# EAGLE board pic_z-machine_emulator (EAGLE 5.07)
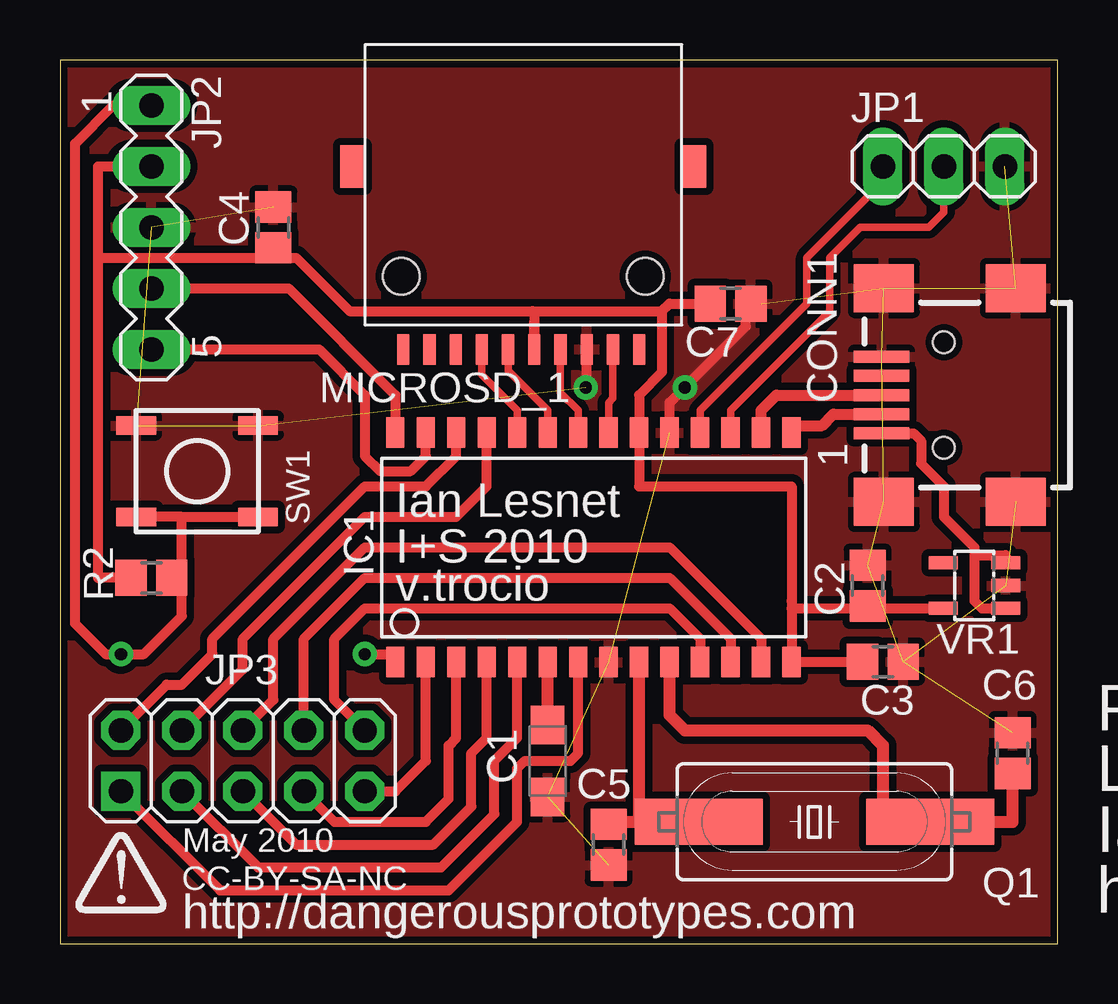
[diagram p0: board, top side]
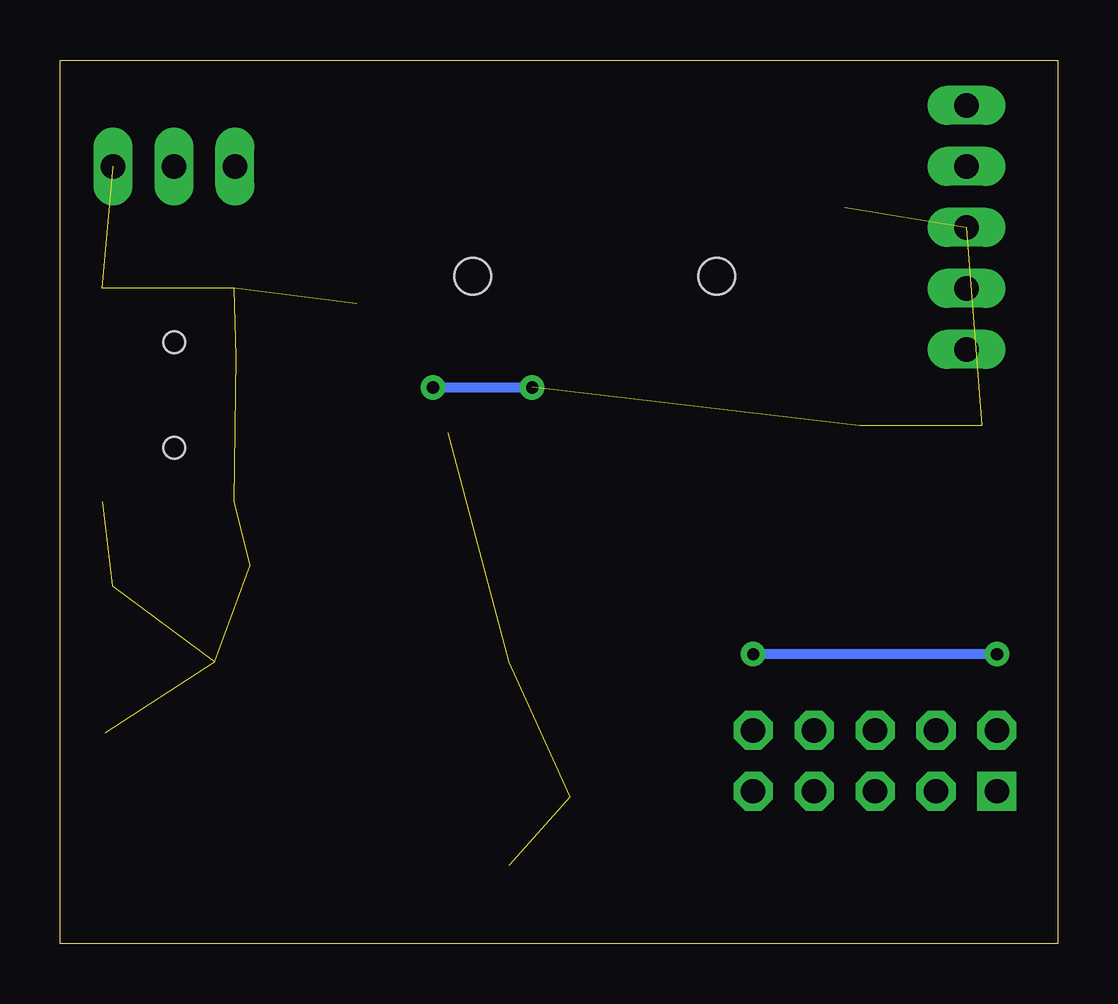
[diagram p1: board, bottom side, seen from below]

Size 41.58 x 36.82 mm. Coordinates in mm from the lower left corner, seen from the top.
Outline: 0,0 41.58,0 41.58,36.82 0,36.82 0,0
Copper layers (1*16): Top 0.035mm / dielectric 1.5mm / Bottom 0.035mm
Design rules "SparkFun": minimum track width 8mil, minimum drill 20mil, track to track 8mil, track to pad 8mil, pad to pad 8mil, via to via 8mil, smd to smd 8mil, copper to edge 10mil, drill to drill 8mil, minimum pad ring 12mil, minimum via ring 10mil, stop-mask expansion 4mil, vias tented up to drill 25mil, thermal gap 10mil

## Footprints (pad centres in the part's own frame; a part is rotated, then mirrored left to right if it is on the bottom)
SMC_A = smd 1.6 x 1.4: + -1.5,0; - 1.5,0
C805 = smd 1.3 x 1.5: 1 -0.85,0; 2 0.85,0
CONN_USB_MINI-B = smd 2 x 2.5: BODY@1 -4.45,2.5; BODY@2 4.45,2.5; BODY@3 4.45,-3; BODY@4 -4.45,-3 | smd 0.5 x 2.3: D+ 0,2.6; D- -0.8,2.6; GND 1.6,2.6; P4 0.8,2.6; VUSB -1.6,2.6 | hole 0.9: -2.2,0; 2.2,0
SOIC28W = smd 0.762 x 1.27: 1 -8.89,-4.78; 2 -7.62,-4.78; 3 -6.35,-4.78; 4 -5.08,-4.78; 5 -3.81,-4.78; 6 -2.54,-4.78; 7 -1.27,-4.78; 8 0,-4.78; 9 1.27,-4.78; 10 2.54,-4.78; 11 3.81,-4.78; 12 5.08,-4.78; 13 6.35,-4.78; 14 7.62,-4.78; 15 7.62,4.78; 16 6.35,4.78; 17 5.08,4.78; 18 3.81,4.78; 19 2.54,4.78; 20 1.27,4.78; 21 0,4.78; 22 -1.27,4.78; 23 -2.54,4.78; 24 -3.81,4.78; 25 -5.08,4.78; 26 -6.35,4.78; 27 -7.62,4.78; 28 -8.89,4.78
1X03 = drill 1.016 long: 1 -2.54,0; 2 0,0; 3 2.54,0
MA05-1 = drill 1.016 long: 1 -5.08,0; 2 -2.54,0; 3 0,0; 4 2.54,0; 5 5.08,0
2X05 = drill 1.016 square: 1 -5.08,-1.27 | drill 1.016 octagon: 2 -5.08,1.27; 3 -2.54,-1.27; 4 -2.54,1.27; 5 0,-1.27; 6 0,1.27; 7 2.54,-1.27; 8 2.54,1.27; 9 5.08,-1.27; 10 5.08,1.27
MICROSD = smd 1.27 x 0.508: 1 0,-7.645; 2 0,-6.553; 3 0,-5.461; 4 0,-4.369; 5 0,-3.277; 6 0,-2.184; 7 0,-1.092; 8 0,0; 9 0,-8.738; 10 0,-9.83 | smd 1.778 x 1.016: RSV1 -7.62,2.286; RSV2 -7.62,-11.938 | hole 1.524: -3.048,-9.906; -3.048,0.254
HC49UP = smd 5.334 x 1.93: 1 -4.826,0; 2 4.826,0
R805 = smd 1.3 x 1.5: 1 -0.85,0; 2 0.85,0
TACT_SWITCH_SMALL = smd 1.651 x 0.762: 1 -2.54,1.905; 2 2.54,1.905; 3 -2.54,-1.905; 4 2.54,-1.905
SOT-23-5 = smd 0.55 x 1.2: 1 -0.95,-1.3; 2 0,-1.3; 3 0.95,-1.3; 4 0.95,1.3; 5 -0.95,1.3

## Placement (x,y rotation side)
C1  10uf  [SMC_A]  20.32,7.62 270 top
C2  1.0uf  [C805]  33.66,14.92 90 top
C3  0.1uf  [C805]  34.29,11.75 0 top
C4  0.1uf  [C805]  8.89,29.84 90 top
C5  23pf  [C805]  22.86,4.13 90 top
C6  23pf  [C805]  39.69,7.94 270 top
C7  0.1uf  [C805]  27.94,26.67 0 top
CONN1  CONN_USB  [CONN_USB_MINI-B]  36.83,22.86 90 top
IC1  PIC18FJ2X50SOIC  [SOIC28W]  22.86,16.51 0 top
JP1  [1X03]  36.83,32.38 0 top
JP2  [MA05-1]  3.81,29.84 270 top
JP3  [2X05]  7.62,7.62 0 top
MICROSD_1  MICROSD  [MICROSD]  24.13,24.77 270 top
Q1  16Mhz  [HC49UP]  31.43,5.08 180 top
R2  10k  [R805]  3.81,15.24 180 top
SW1  [TACT_SWITCH_SMALL]  5.71,19.69 180 top
U$1  [DP-LOGO_TOP]  0.63,1.27 0 top
VR1  MIC5205-3V3  [SOT-23-5]  38.1,14.92 90 top

## Library data of the parts
C1 = rcl
C2-C7 CONN1 IC1 R2 SW1 VR1 = dp_devices
JP1 JP3 = pinhead-2
JP2 = con-lstb
MICROSD_1 = Seeed
Q1 = crystal
U$1 = DP-logo

## Nets
!MCLR: IC1.1 JP2.1 R2.1 SW1.1 SW1.2
+3V3: C2.1 C3.1 C4.1 C7.1 IC1.14 IC1.20 JP2.2 MICROSD_1.4 R2.2 VR1.5
GND: C1.- C2.2 C3.2 C4.2 C5.1 C6.1 C7.2 CONN1.BODY@1 CONN1.BODY@2 CONN1.BODY@3 CONN1.BODY@4 CONN1.GND IC1.8 IC1.19 JP1.3 JP2.3 MICROSD_1.6 SW1.3 SW1.4 VR1.2
N$2: C1.+ IC1.6
N$4: C5.2 IC1.9 Q1.2
N$5: C6.2 IC1.10 Q1.1
PGC: IC1.27 JP2.5
PGD: IC1.28 JP2.4
RA2: IC1.4 JP3.5
RA3: IC1.5 JP3.3
RB4: IC1.25 JP3.4
RB5: IC1.26 JP3.2
RP0: IC1.2 JP3.9
RP1: IC1.3 JP3.7
RP2: IC1.7 JP3.1
RP11: IC1.11 JP3.10
RP12: IC1.12 JP3.8
RP13: IC1.13 JP3.6
RX1: IC1.18 JP1.1
SDCLK: IC1.22 MICROSD_1.5
SDCS: IC1.24 MICROSD_1.2
SDMISO: IC1.21 MICROSD_1.7
SDMOSI: IC1.23 MICROSD_1.3
TX1: IC1.17 JP1.2
USB_D+: CONN1.D+ IC1.16
USB_D-: CONN1.D- IC1.15
VUSB: CONN1.VUSB VR1.1 VR1.3

## Tracks (layer width: path | path; a pad name or v marks a point on that pad's centre or on a via)
!MCLR  (via drill 0.51)
  Top 0.406: 13.97,11.43 IC1.1 13.97,12.06 v12.7,12.06 | 5.08,15.24 5.08,13.65 3.49,12.06 v2.54,12.06 1.9,12.06 0.63,13.33 0.63,33.34 2.22,34.92 JP2.1 | 5.08,17.78 SW1.2 | 5.08,17.78 SW1.1 | 5.08,15.24 R2.1 | 5.08,15.24 5.08,17.78
  Bottom 0.406: v2.54,12.06 v12.7,12.06
+3V3
  Top 0.406: 30.48,14.29 30.48,19.05 24.13,19.05 IC1.20 24.13,22.86 25.08,23.81 25.08,26.35 | 30.48,14.29 IC1.14 30.5,11.75 C3.1 | 33.76,13.97 VR1.5 | 33.76,13.97 C2.1 | 33.76,13.97 30.48,13.97 30.48,14.29 | R2.2 1.59,15.24 1.59,28.57 | JP2.2 1.59,32.38 1.59,28.57 | 19.76,25.96 MICROSD_1.4 19.76,26.28 19.68,26.35 | 19.68,26.35 25.08,26.35 | 25.08,26.35 25.4,26.67 C7.1 | 19.68,26.35 12.06,26.35 9.84,28.57 8.89,28.57 | 1.59,28.57 8.89,28.57 | 8.89,28.57 C4.1
GND  (via drill 0.51)  (17 unrouted)
  Top 0.406: IC1.19 25.4,22.54 v26.03,23.18 28.58,25.72 28.58,26.67 C7.2 29.21,26.67 | MICROSD_1.6 21.95,23.77 v21.91,23.18
  Bottom 0.406: v26.03,23.18 v21.91,23.18
  pour Top (isolate 0.305): 0,36.83 41.91,36.83 41.91,0 0,0
N$2
  Top 0.508: C1.+ IC1.6
N$4
  Top 0.305: 24.13,5.08 Q1.2 | C5.2 22.86,5.08 C5.2
  Top 0.508: IC1.9 24.13,5.08 22.86,5.08
N$5
  Top 0.305: 34.29,5.08 Q1.1
  Top 0.508: IC1.10 25.4,9.53 26.03,8.89 33.66,8.89 34.29,8.26 34.29,5.08 | Q1.1 39.69,5.08 C6.2
PGC
  Top 0.406: IC1.27 15.24,20.32 14.61,19.69 13.34,19.69 12.7,20.32 12.7,22.86 10.79,24.77 JP2.5
PGD
  Top 0.406: IC1.28 13.97,22.86 9.52,27.3 JP2.4
RA2
  Top 0.406: IC1.4 17.78,8.57 17.14,7.94 17.14,5.71 15.56,4.13 9.84,4.13 JP3.5
RA3
  Top 0.406: IC1.5 19.05,8.57 18.1,7.62 18.1,5.4 15.88,3.18 8.25,3.18 JP3.3
RB4
  Top 0.406: IC1.25 17.78,19.05 16.51,17.78 12.7,17.78 7.62,12.7 7.62,11.43 JP3.4
RB5
  Top 0.406: IC1.26 16.51,20.32 15.24,19.05 12.7,19.05 6.35,12.7 6.35,12.06 5.08,10.79 4.45,10.79 JP3.2
RP0
  Top 0.406: IC1.2 15.24,7.62 13.97,6.35 JP3.9
RP1
  Top 0.406: IC1.3 16.51,8.57 16.19,8.26 16.19,6.03 15.24,5.08 11.43,5.08 JP3.7
RP2
  Top 0.406: IC1.7 21.59,7.94 21.27,7.62 19.37,7.62 19.05,7.3 19.05,5.08 16.19,2.22 6.67,2.22 JP3.1
RP11
  Top 0.406: IC1.11 26.67,12.7 25.4,13.97 12.7,13.97 11.43,12.7 11.43,10.16 JP3.10
RP12
  Top 0.406: JP3.8 10.16,12.7 12.7,15.24 25.4,15.24 27.94,12.7 IC1.12
RP13
  Top 0.406: IC1.13 29.21,12.7 25.4,16.51 12.7,16.51 8.89,12.7 8.89,10.16 JP3.6
RX1
  Top 0.305: IC1.18 26.67,22.23 31.12,26.67 31.12,28.57 34.29,31.75 JP1.1
SDCLK
  Top 0.305: MICROSD_1.5 20.85,22.96 21.59,22.23 IC1.22
SDCS
  Top 0.305: MICROSD_1.2 17.58,23.7 19.05,22.23 IC1.24
SDMISO
  Top 0.305: MICROSD_1.7 23.04,22.72 22.86,22.54 IC1.21
SDMOSI
  Top 0.305: MICROSD_1.3 18.67,23.88 20.32,22.23 IC1.23
TX1
  Top 0.305: JP1.2 36.83,30.48 36.2,29.84 33.34,29.84 32.07,28.57 32.07,26.35 27.94,22.23 IC1.17
USB_D+
  Top 0.457: CONN1.D+ 29.84,22.86 29.21,22.23 IC1.16
USB_D-
  Top 0.305: IC1.15 30.78,21.59
  Top 0.457: CONN1.D- 32.22,22.06 31.75,21.59 30.78,21.59
VUSB
  Top 0.406: VR1.3 39.4,16.19 38.1,16.19 | VR1.1 38.41,13.97 38.1,14.29 38.1,16.19 | 38.1,16.19 38.1,16.51 36.83,17.78 36.83,19.05 35.88,20 35.88,20.95 35.57,21.26 CONN1.VUSB

## Text on the board
tNames: Ian Lesnet | I+S 2010 | v.trocio | PIC Z-MACHINE EMULATOR | LICENSE | May 2010 | Ian Lesnet 2010 | CC-BY-SA-NC | http://dangerousprototypes.com | http://dangerousprototypes.com